# EAGLE board PS2 Shield 3 (EAGLE 6.3)
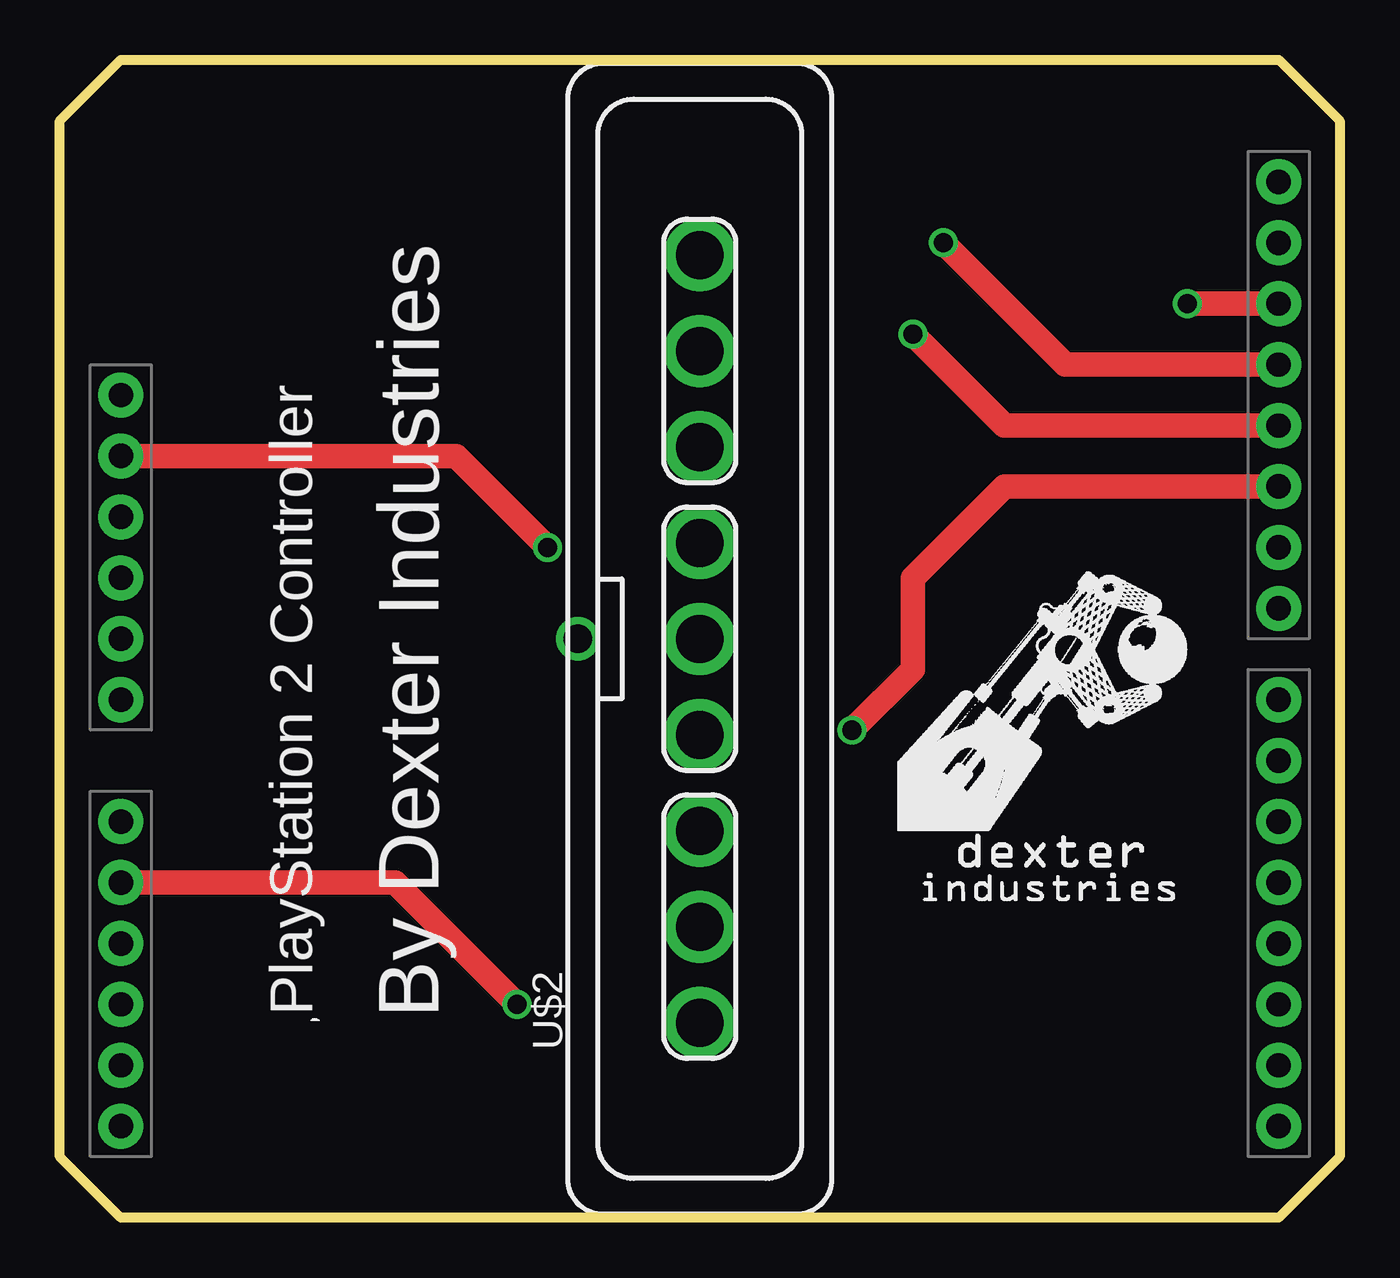
[diagram p0: board, top side]
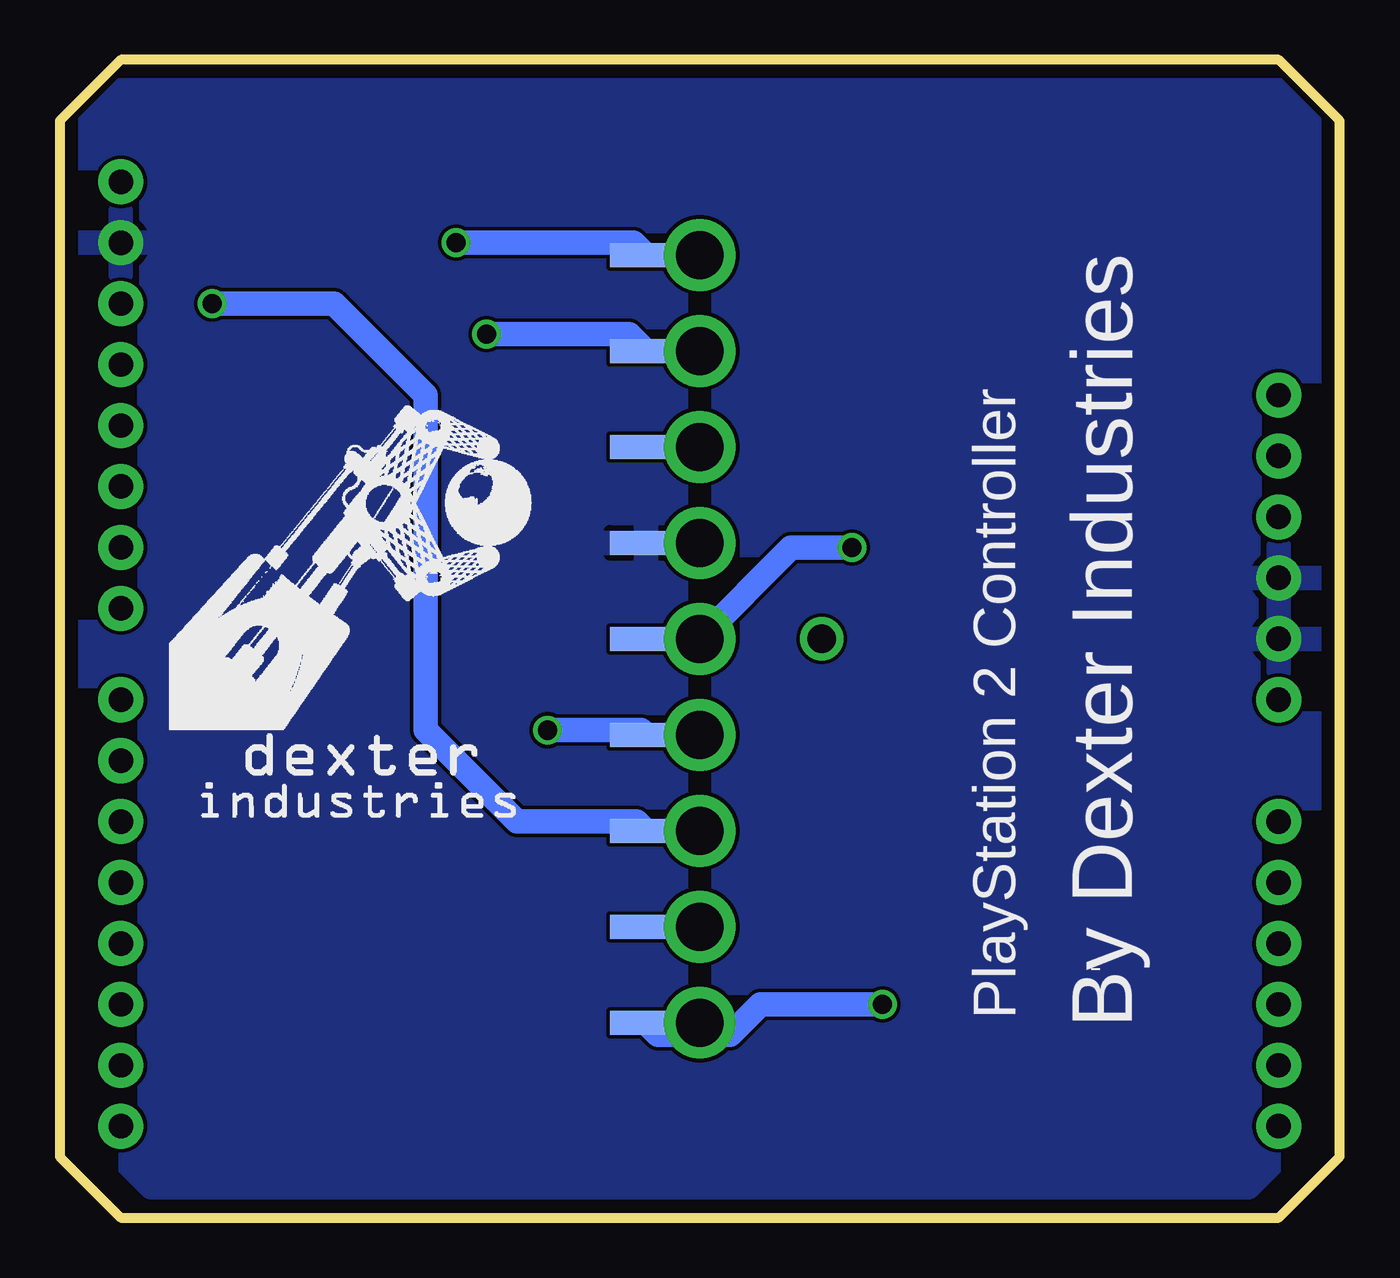
[diagram p1: board, bottom side, seen from below]

Size 53.34 x 48.26 mm. Coordinates in mm from the lower left corner, seen from the top.
Outline: 0,2.54 0,45.72 2.54,48.26 50.8,48.26 53.34,45.72 53.34,2.54 50.8,0 2.54,0 0,2.54
Copper layers (1*16): Top 0.035mm / dielectric 1.5mm / Bottom 0.035mm
Design rules "Fusion_eagle_rule_v1.1": minimum track width 6mil, minimum drill 12mil, track to track 6mil, track to pad 6mil, pad to pad 6mil, via to via 6mil, smd to smd 0mil, copper to edge 10mil, drill to drill 10mil, minimum pad ring 10mil, minimum via ring 6mil, stop-mask expansion 2mil, vias tented up to drill 100mil, thermal gap 10mil

## Footprints (pad centres in the part's own frame; a part is rotated, then mirrored left to right if it is on the bottom)
DUEMILANOVE_VIAS = drill 1.016 pad 1.88: 3.3V 50.8,13.97; 5V 50.8,16.51; A0 50.8,29.21; A1 50.8,31.75; A2 50.8,34.29; A3 50.8,36.83; A4 50.8,39.37; A5 50.8,41.91; AREF 2.54,2.54; D2 2.54,36.83; D3 2.54,34.29; D4 2.54,31.75; D5 2.54,29.21; D6 2.54,26.67; D7 2.54,24.13; D8 2.54,20.32; D9 2.54,17.78; D10 2.54,15.24; D11 2.54,12.7; D12 2.54,10.16; D13 2.54,7.62; GND@0 50.8,19.05; GND@1 50.8,21.59; GND@2 2.54,5.08; RES 50.8,11.43; RX 2.54,41.91; TX 2.54,39.37; VIN 50.8,24.13
PSX09 = smd 1 x 3 bottom: 1 -16,-2.25; 2 -12,-2.25; 3 -8,-2.25; 4 -4,-2.25; 5 0,-2.25; 6 4,-2.25; 7 8,-2.25; 8 12,-2.25; 9 16,-2.25 | drill 1.2: P$1 0,5.08 | drill 2: P$2 -16,0; P$3 -12,0; P$4 -8,0; P$5 -4,0; P$6 0,0; P$7 4,0; P$8 8,0; P$9 12,0; P$10 16,0

## Placement (x,y rotation side)
U1  ARDUINO_SHIELDNO_SILK  [DUEMILANOVE_VIAS]  53.34,45.72 180 top
U$2  PSX09  [PSX09]  26.67,24.13 90 top

## Library data of the parts
U1 = SparkFun-f115009
U$2 = DexterIndustries 3.0

## Nets
3V3: U1.3.3V U$2.5
ACK: U1.A1 U$2.1
ATT: U1.D10 U$2.4
CLK: U1.D13 U$2.3
CMD: U1.D11 U$2.8
DATA: U1.D12 U$2.9
GND: U1.GND@0 U1.GND@1 U1.GND@2 U$2.6

## Tracks (layer width: path | path; a pad name or v marks a point on that pad's centre or on a via)
3V3  (via drill 0.8)
  Top 1.016: U1.3.3V 16.51,31.75 v20.32,27.94
  Bottom 1.016: v20.32,27.94 22.86,27.94 26.67,24.13 U$2.5
ACK  (via drill 0.8)
  Top 1.016: U1.A1 13.97,13.97 v19.05,8.89
  Bottom 1.016: v19.05,8.89 24.13,8.89 25.4,7.62 28.41,7.62 U$2.1
ATT  (via drill 0.8)
  Top 1.016: U1.D10 39.37,30.48 35.56,26.67 35.56,22.86 v33.02,20.32
  Bottom 1.016: v33.02,20.32 29.11,20.32 U$2.4
CLK  (via drill 0.8)
  Top 1.016: U1.D13 v46.99,38.1
  Bottom 1.016: v46.99,38.1 41.91,38.1 38.1,34.29 38.1,20.32 34.29,16.51 29.3,16.51 U$2.3
CMD  (via drill 0.8)
  Top 1.016: U1.D11 39.37,33.02 v35.56,36.83
  Bottom 1.016: v35.56,36.83 29.62,36.83 U$2.8
DATA  (via drill 0.8)
  Top 1.016: U1.D12 41.91,35.56 v36.83,40.64
  Bottom 1.016: v36.83,40.64 29.43,40.64 U$2.9
GND
  pour Bottom: 2.54,46.99 50.8,46.99 52.07,45.72 52.07,3.81 49.53,1.27 3.81,1.27 1.27,3.81 1.27,45.72

## Text on the board
tNames: PlayStation 2 Controller | By Dexter Industries
bNames: By Dexter Industries | PlayStation 2 Controller